# EAGLE board PCB-ACMb (EAGLE 6.4)
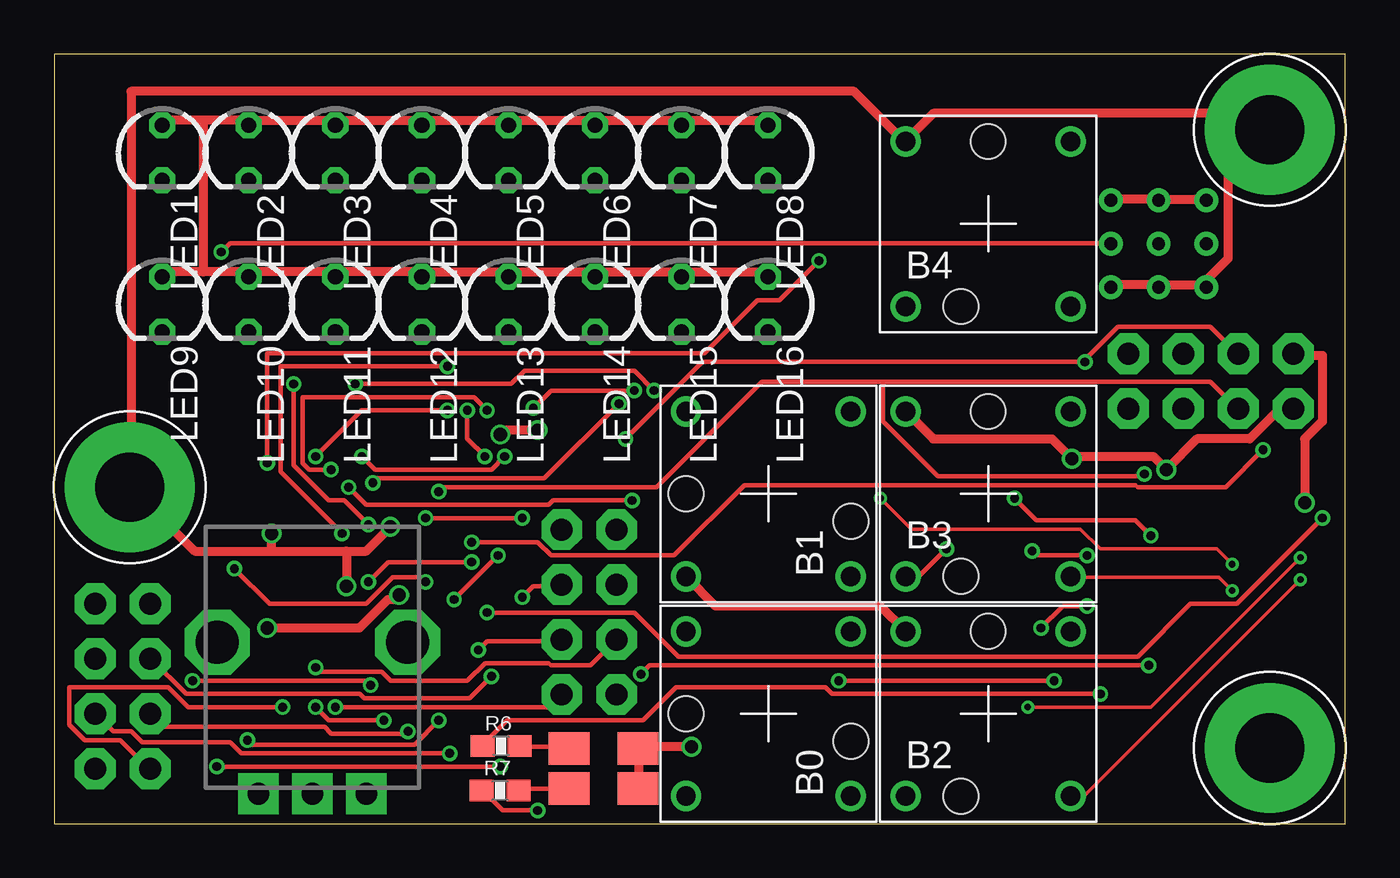
[diagram p0: board, top side]
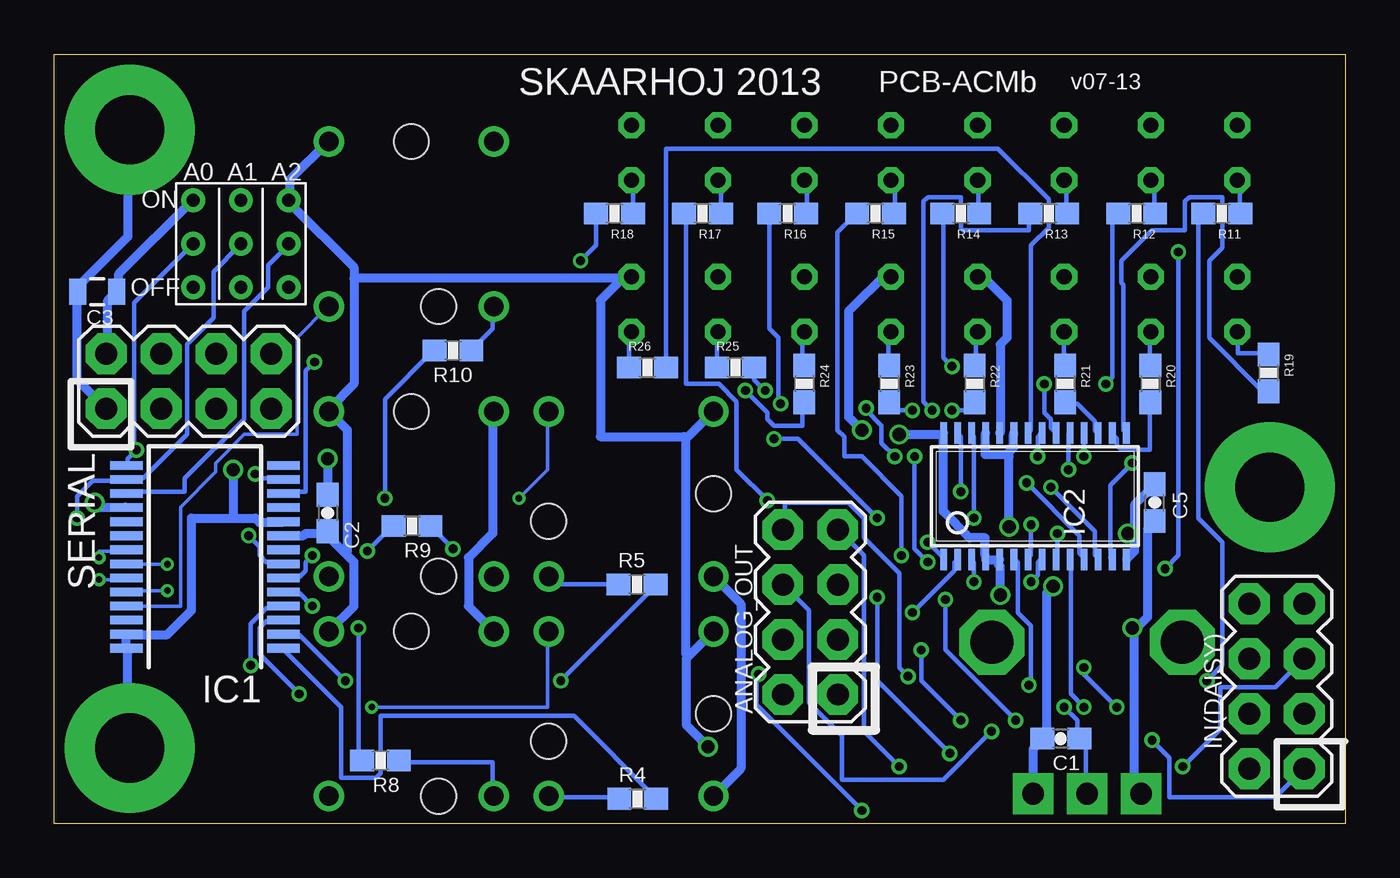
[diagram p1: board, bottom side, seen from below]

Size 59.69 x 35.56 mm. Coordinates in mm from the lower left corner, seen from the top.
Outline: 0,0 59.69,0 59.69,35.56 0,35.56 0,0
Copper layers (1*16): Top 0.035mm / dielectric 1.5mm / Bottom 0.035mm
Design rules "Fusion_eagle_rule_v1.1": minimum track width 6mil, minimum drill 12mil, track to track 6mil, track to pad 6mil, pad to pad 6mil, via to via 6mil, smd to smd 0mil, copper to edge 10mil, drill to drill 10mil, minimum pad ring 10mil, minimum via ring 6mil, stop-mask expansion 2mil, vias tented up to drill 100mil, thermal gap 10mil
Net classes: 0 default: width 0.203 mm, drill 0.406 mm, clearance 0.152 mm; 1 Power: width 0.406 mm, drill 0.61 mm, clearance 0.203 mm; 2 Signal: width 0.152 mm, clearance 0.152 mm

## Footprints (pad centres in the part's own frame; a part is rotated, then mirrored left to right if it is on the bottom)
2X4 = drill 1.016 pad 1.88 octagon: 1 -3.81,-1.27; 2 -3.81,1.27; 3 -1.27,-1.27; 4 -1.27,1.27; 5 1.27,-1.27; 6 1.27,1.27; 7 3.81,-1.27; 8 3.81,1.27
CFPB-6/9MM = drill 0.9: P$1 -3.81,3.81; P$2 3.81,-3.81; P$3 3.81,3.81; P$4 -3.81,-3.81 | hole 1.6: 0,3.81; -1.27,-3.81
LEDBICOLOR-SMD = smd 1.9 x 1.5: P$1 1.6,0.925; P$2 -1.6,0.925; P$3 1.6,-0.925; P$4 -1.6,-0.925
0603-CAP = smd 1.1 x 1: 1 -0.85,0; 2 0.85,0
0805 = smd 0.8 x 1.2: 1 -0.9,0; 2 0.9,0
SSOP28 = smd 0.4 x 1.5: 1 -4.225,-3.625; 2 -3.575,-3.625; 3 -2.925,-3.625; 4 -2.275,-3.625; 5 -1.625,-3.625; 6 -0.975,-3.625; 7 -0.325,-3.625; 8 0.325,-3.625; 9 0.975,-3.625; 10 1.625,-3.625; 11 2.275,-3.625; 12 2.925,-3.625; 13 3.575,-3.625; 14 4.225,-3.625; 15 4.225,3.625; 16 3.575,3.625; 17 2.925,3.625; 18 2.275,3.625; 19 1.625,3.625; 20 0.975,3.625; 21 0.325,3.625; 22 -0.325,3.625; 23 -0.975,3.625; 24 -1.625,3.625; 25 -2.275,3.625; 26 -2.925,3.625; 27 -3.575,3.625; 28 -4.225,3.625
TSSOP28 = smd 0.305 x 0.991: 1 -4.225,-2.918; 2 -3.575,-2.918; 3 -2.925,-2.918; 4 -2.275,-2.918; 5 -1.625,-2.918; 6 -0.975,-2.918; 7 -0.325,-2.918; 8 0.325,-2.918; 9 0.975,-2.918; 10 1.625,-2.918; 11 2.275,-2.918; 12 2.925,-2.918; 13 3.575,-2.918; 14 4.225,-2.918; 15 4.225,2.918; 16 3.575,2.918; 17 2.925,2.918; 18 2.275,2.918; 19 1.625,2.918; 20 0.975,2.918; 21 0.325,2.918; 22 -0.325,2.918; 23 -0.975,2.918; 24 -1.625,2.918; 25 -2.275,2.918; 26 -2.925,2.918; 27 -3.575,2.918; 28 -4.225,2.918
LED3MM = drill 0.7 pad 1.2 octagon: A -1.27,0; K 1.27,0
ALPS_POT = drill 1 pad 1.88 square: P$1 7,-2.5; P$2 7,0; P$3 7,2.5 | drill 2 octagon: P$4 0,-4.4; P$5 0,4.4
0603-RES = smd 1.1 x 1: 1 -0.85,0; 2 0.85,0
3.2MMPAD6MM = drill 3.2 pad 6: P$1 0,0
3BITADDR = drill 0.6: A0 -2.2,0; A1 0,0; A2 2.2,0; H1 -2.2,2; H2 0,2; H3 2.2,2; L1 -2.2,-2; L2 0,-2; L3 2.2,-2

## Placement (x,y rotation side)
ANALOG_OUT  M04X2  [2X4]  24.73,9.78 90 bottom
B0  CFPB  [CFPB-6/9MM]  33.02,5.08 90 top
B1  CFPB  [CFPB-6/9MM]  33.02,15.24 90 top
B2  CFPB  [CFPB-6/9MM]  43.18,5.08 0 top
B3  CFPB  [CFPB-6/9MM]  43.18,15.24 0 top
B4  CFPB  [CFPB-6/9MM]  43.18,27.71 0 top
BILED1  LEDBICOLOR-SMD  [LEDBICOLOR-SMD]  25.4,2.54 0 top
C1  10nF  [0603-CAP]  13.15,3.93 180 bottom
C2  100nF  [0603-CAP]  47.05,14.36 270 bottom
C3  10uF  [0805]  57.7,24.58 180 bottom
C5  100nF  [0603-CAP]  8.81,14.84 90 bottom
IC1  MCP23017SS  [SSOP28]  52.72,12.33 90 bottom
IC2  PCA9685  [TSSOP28]  14.35,15.13 0 bottom
IN(DAISY)  M04X2  [2X4]  3.17,6.35 90 bottom
LED1  LED3MM  [LED3MM]  5,31 270 top
LED2  LED3MM  [LED3MM]  9,31 270 top
LED3  LED3MM  [LED3MM]  13,31 270 top
LED4  LED3MM  [LED3MM]  17,31 270 top
LED5  LED3MM  [LED3MM]  21,31 270 top
LED6  LED3MM  [LED3MM]  25,31 270 top
LED7  LED3MM  [LED3MM]  29,31 270 top
LED8  LED3MM  [LED3MM]  33,31 270 top
LED9  LED3MM  [LED3MM]  5,24 270 top
LED10  LED3MM  [LED3MM]  9,24 270 top
LED11  LED3MM  [LED3MM]  13,24 270 top
LED12  LED3MM  [LED3MM]  17,24 270 top
LED13  LED3MM  [LED3MM]  21,24 270 top
LED14  LED3MM  [LED3MM]  25,24 270 top
LED15  LED3MM  [LED3MM]  29,24 270 top
LED16  LED3MM  [LED3MM]  33,24 270 top
POT1  [ALPS_POT]  11.94,8.38 270 top
R4  47R  [0603-RES]  32.71,1.15 0 bottom
R5  47R  [0603-RES]  32.74,11.06 0 bottom
R6  820R  [0603-RES]  20.66,3.6 180 top
R7  150R  [0603-RES]  20.61,1.53 180 top
R8  47R  [0603-RES]  44.6,2.91 180 bottom
R9  47R  [0603-RES]  43.15,13.76 180 bottom
R10  47R  [0603-RES]  41.25,21.86 180 bottom
R11  270R  [0603-RES]  5.71,28.19 180 bottom
R12  270R  [0603-RES]  9.65,28.19 180 bottom
R13  270R  [0603-RES]  13.72,28.19 180 bottom
R14  270R  [0603-RES]  17.78,28.19 180 bottom
R15  270R  [0603-RES]  21.72,28.19 180 bottom
R16  270R  [0603-RES]  25.78,28.19 180 bottom
R17  270R  [0603-RES]  29.72,28.19 180 bottom
R18  270R  [0603-RES]  33.78,28.19 180 bottom
R19  270R  [0603-RES]  3.56,20.83 270 bottom
R20  270R  [0603-RES]  9.02,20.32 270 bottom
R21  270R  [0603-RES]  12.95,20.32 270 bottom
R22  270R  [0603-RES]  17.14,20.32 270 bottom
R23  270R  [0603-RES]  21.08,20.32 270 bottom
R24  270R  [0603-RES]  25.02,20.32 270 bottom
R25  270R  [0603-RES]  28.19,21.08 0 bottom
R26  270R  [0603-RES]  32.26,21.08 0 bottom
SERIAL  M04X2  [2X4]  53.47,20.45 0 bottom
U$15  GNDPAD6MM  [3.2MMPAD6MM]  56.19,3.5 0 top
U$19  3BITADDR  [3BITADDR]  51.05,26.8 0 bottom
U$20  GNDPAD6MM  [3.2MMPAD6MM]  3.5,15.55 0 top
U$21  GNDPAD6MM  [3.2MMPAD6MM]  56.19,32.06 0 top

## Library data of the parts
ANALOG_OUT C1-C3 C5 IN(DAISY) POT1 R4-R26 SERIAL = SparkFun
B0 B1-B4 BILED1 LED1-LED16 U$15 U$19-U$21 = SKAARHOJ
IC1 = microchip; MF: MICROCHIP; MPN: MCP23017-E/SS; OC_FARNELL: 1467674; OC_NEWARK: 31K2960
IC2 = wsmith

## Nets
5V [Power]: B0.P$3 B1.P$3 B2.P$3 B3.P$3 B4.P$3 BILED1.P$1 BILED1.P$3 C2.2 C3.1 C5.1 IC1.9 IC1.18 IC2.4 IC2.5 IC2.24 IC2.28 LED1.A LED2.A LED3.A LED4.A LED5.A LED6.A LED7.A LED8.A LED9.A LED10.A LED11.A LED12.A LED13.A LED14.A LED15.A LED16.A POT1.P$1 SERIAL.2 U$19.H1 U$19.H2 U$19.H3
A0: IC1.15 IC2.1 U$19.A0
A1: IC1.16 IC2.2 U$19.A1
A2: IC1.17 IC2.3 U$19.A2
ANALOG1: ANALOG_OUT.1 C1.1 POT1.P$2
GND [Power]: B0.P$1 B1.P$1 B2.P$1 B3.P$1 B4.P$1 C1.2 C2.1 C3.2 C5.2 IC1.10 IC1.27 IC1.28 IC2.14 IC2.23 IC2.25 POT1.P$3 SERIAL.1 U$15.P$1 U$19.L1 U$19.L2 U$19.L3 U$20.P$1 U$21.P$1
GPA0 [Signal]: B0.P$2 IC1.21
GPA1 [Signal]: B1.P$2 IC1.22
GPA2 [Signal]: B2.P$2 IC1.23
GPA3 [Signal]: B3.P$2 IC1.24
GPA4 [Signal]: B4.P$2 IC1.25
GPA5 [Signal]: IC1.26
I2C_SCL: IC1.12 IC2.26 SERIAL.4
I2C_SDA: IC1.13 IC2.27 SERIAL.3
L0: LED1.K R11.1
L1: LED2.K R12.1
L2: LED3.K R13.1
L3: LED4.K R14.1
L4: LED5.K R15.1
L5: LED6.K R16.1
L6: LED7.K R17.1
L7: LED8.K R18.1
L8: LED9.K R19.1
L9: LED10.K R20.1
L10: LED11.K R21.1
L11: LED12.K R22.1
L12: LED13.K R23.1
L13: LED14.K R24.1
L14: LED15.K R25.1
L15: LED16.K R26.1
LC0: B0.P$4 R4.1
LC1: B1.P$4 R5.1
LC2: BILED1.P$2 R6.1
LC3: BILED1.P$4 R7.1
LC4: B2.P$4 R8.1
LC5: B3.P$4 R9.1
LC6: B4.P$4 R10.1
N$1: IC2.13 R18.2
N$2: IC1.4 R7.2
N$3: IC1.5 R8.2
N$4: IC1.6 R9.2
N$5: IC1.7 R10.2
N$7: IC1.3 R6.2
N$8: IC1.2 R5.2
N$9: IC1.1 R4.2
N$10: ANALOG_OUT.3 IN(DAISY).1
N$11: ANALOG_OUT.5 IN(DAISY).3
N$12: ANALOG_OUT.7 IN(DAISY).5
N$13: ANALOG_OUT.4 IN(DAISY).2
N$14: ANALOG_OUT.6 IN(DAISY).4
N$15: ANALOG_OUT.8 IN(DAISY).6
N$16: IC2.12 R17.2
N$17: IC2.11 R16.2
N$18: IC2.10 R15.2
N$19: IC2.9 R14.2
N$20: IC2.8 R13.2
N$21: IC2.7 R12.2
N$22: IC2.6 R11.2
N$23: IC2.15 R19.2
N$24: IC2.16 R20.2
N$25: IC2.17 R21.2
N$26: IC2.18 R22.2
N$27: IC2.19 R23.2
N$28: IC2.20 R24.2
N$29: IC2.21 R25.2
N$30: IC2.22 R26.2

## Tracks (layer width: path | path; a pad name or v marks a point on that pad's centre or on a via)
5V  (via drill 0.61)
  Top 0.406: U$19.H3 48.87,28.85 51,28.85 U$19.H2 51.21,28.85 53.24,28.85 U$19.H1 | v57.81,14.83 57.81,17.78 58.62,18.59 58.62,21.64 57.3,21.64 SERIAL.2 | 6.91,32.51 8.84,32.51 LED2.A 9.04,32.51 12.9,32.51 LED3.A 13.11,32.51 16.87,32.51 LED4.A 17.07,32.51 20.83,32.51 LED5.A 21.03,32.51 24.89,32.51 LED6.A 25.09,32.51 28.85,32.51 LED7.A 29.06,32.51 32.82,32.51 LED8.A | 6.91,32.51 4.98,32.51 LED1.A | v15.95,10.57 15.75,10.36 15.44,10.36 14.12,9.04 v9.86,9.04 | BILED1.P$3 27.03,1.63 27.03,3.45 BILED1.P$1 27.23,3.45 27.33,3.56 v29.46,3.56 | 6.91,25.5 8.94,25.5 LED10.A 9.14,25.5 12.9,25.5 LED11.A 13.11,25.5 16.97,25.5 LED12.A 17.17,25.5 21.03,25.5 LED13.A 21.23,25.5 24.99,25.5 LED14.A 25.2,25.5 28.96,25.5 LED15.A 29.16,25.5 33.02,25.5 LED16.A | 6.91,25.5 5.08,25.5 LED9.A | v20.62,17.98 20.83,18.19 v22.35,18.19 | 6.91,25.5 6.91,32.51
  Bottom 0.406: IC1.9 49.07,13.31 48.16,13.31 48.06,13.41 47.14,13.41 C2.2 47.04,13.31 46.23,12.5 | 46.23,12.5 45.82,12.09 45.82,10.06 B2.P$3 | 46.23,12.5 46.13,12.6 46.13,18.19 B3.P$3 46.94,19.2 45.82,20.32 45.82,25.2 | B4.P$3 47.04,31.5 48.77,29.77 48.77,28.85 U$19.H3 48.77,28.65 45.82,25.7 45.82,25.2 | SERIAL.2 57.2,21.74 57.2,24.18 56.9,24.49 C3.1 56.69,24.69 56.69,25.4 53.34,28.75 U$19.H1 | v57.81,14.83 57.81,14.63 56.39,14.63 IC1.18 | 18.59,17.98 18.59,14.43 17.37,13.21 16.66,13.21 16.66,12.39 IC2.4 16.56,12.19 16.05,12.19 IC2.5 16.05,11.99 15.95,11.89 v15.95,10.57 | 18.59,17.98 IC2.28 | 9.75,8.94 9.14,9.55 9.14,13.61 8.84,13.92 C5.1 | 9.75,8.94 9.75,1.73 9.45,1.42 POT1.P$1 | v9.86,9.04 9.75,8.94 | v29.46,3.56 30.48,4.57 30.48,7.62 30.38,7.72 | B0.P$3 30.38,7.72 | 30.48,17.78 B1.P$3 | 30.48,17.78 30.48,7.82 30.38,7.72 | IC2.24 15.95,18.09 15.95,22.15 15.65,22.45 15.65,24.18 16.97,25.5 LED12.A | 30.48,17.78 30.58,17.88 34.44,17.88 34.44,24.18 33.12,25.5 LED16.A 33.63,25.2 45.82,25.2 | v20.62,17.98 18.59,17.98 | v22.35,18.19 22.96,18.8 22.96,23.67 21.13,25.5 LED13.A
A0  (via drill 0.41)
  Top 0.203: v19.3,13.01 22.35,13.01 22.96,12.39 28.65,12.39 31.9,15.65 49.99,15.65 50.09,15.54 54.15,15.54 v55.88,17.27
  Bottom 0.203: v19.3,13.01 18.59,12.29 IC2.1 | IC1.15 56.29,16.56 56.29,16.87 v55.88,17.27 55.98,17.27 55.98,24.08 53.34,26.72 U$19.A0
A1  (via drill 0.41)
  Top 0.203: v20.02,9.75 26.82,9.75 28.85,7.72 50.09,7.72 52.53,10.16 54.66,10.16 v58.62,14.12
  Bottom 0.203: v20.02,9.75 18.09,11.68 18.09,12.09 17.98,12.19 IC2.2 | v58.62,14.12 58.62,15.14 57.91,15.85 56.39,15.85 IC1.16 56.29,15.95 55.58,15.95 53.54,17.98 53.54,22.15 52.32,23.37 52.32,25.5 51.1,26.72 U$19.A1
A2  (via drill 0.41)
  Top 0.203: v17.17,11.18 16.97,11.38 15.65,11.38 14.43,10.16 9.96,10.16 v8.33,11.79 | v7.72,26.42 8.13,26.82 48.77,26.82 U$19.A2
  Bottom 0.203: v17.17,11.18 17.17,12.09 17.27,12.19 IC2.3 | v8.33,11.79 7.72,12.39 v7.72,26.42 | IC1.17 56.29,15.34 53.65,15.34 53.65,15.95 50.9,18.69 50.9,23.67 49.78,24.79 49.78,25.81 48.87,26.72 U$19.A2
ANALOG1  (via drill 0.41)
  Top 0.203: v13.01,5.38 22.86,5.38 23.37,5.89 ANALOG_OUT.1
  Bottom 0.203: POT1.P$2 11.99,1.42 11.99,3.56 12.29,3.86 C1.1 12.39,3.96 12.39,4.78 v13.01,5.38
GND  (via drill 0.61)
  Top 0.406: B3.P$1 40.64,17.78 46.13,17.78 v47.04,16.87 47.14,16.97 50.8,16.97 v51.41,16.36 52.83,17.78 55.27,17.78 56.59,19.1 57.2,19.1 SERIAL.1 | B1.P$1 30.58,10.06 38.2,10.06 B2.P$1 | v15.54,13.72 14.43,12.6 13.51,12.6 | 10.06,12.6 6.5,12.6 3.56,15.54 U$20.P$1 3.56,15.75 3.56,33.83 36.98,33.83 39.22,31.6 B4.P$1 39.42,31.6 40.64,32.82 55.47,32.82 56.19,32.11 U$21.P$1 54.25,32.72 54.25,26.11 53.24,25.09 U$19.L1 53.24,24.89 51.21,24.89 U$19.L2 51,24.89 48.87,24.89 U$19.L3 | 10.06,12.6 13.51,12.6 | 10.06,12.6 v10.06,13.41 | 13.51,12.6 v13.51,10.97
  Bottom 0.406: 51.41,14.12 53.34,14.12 53.34,9.86 54.46,8.74 56.19,8.74 IC1.27 56.39,8.74 56.39,8.13 IC1.28 56.29,7.92 56.29,3.56 U$15.P$1 | 51.41,14.12 50.39,14.12 50.19,13.92 49.17,13.92 IC1.10 | B0.P$1 27.94,2.54 27.94,10.16 B1.P$1 | v47.04,16.87 47.04,15.24 C2.1 | B2.P$1 40.54,10.06 40.54,12.29 39.42,13.41 39.42,19 B3.P$1 | v51.41,16.36 51.41,14.12 | POT1.P$3 14.43,1.42 14.43,3.45 14.02,3.86 C1.2 13.92,4.06 13.82,4.17 13.82,10.67 v13.51,10.97 | 9.75,13.41 9.75,14.73 8.84,15.65 C5.2 | 9.75,13.41 9.75,12.6 10.06,12.29 IC2.14 | 15.65,17.07 15.34,17.37 15.34,17.98 IC2.23 | 15.65,17.07 16.66,17.07 16.66,17.98 IC2.25 | v15.54,13.72 15.54,16.97 15.65,17.07 | v10.06,13.41 9.75,13.41 | SERIAL.1 58.62,20.52 58.62,24.49 C3.2 58.62,24.79 56.29,27.13 56.29,32 U$21.P$1
GPA0  (via drill 0.3)
  Top 0.152: v57.61,12.29 50.7,5.38 v45.01,5.38
  Bottom 0.152: v57.61,12.29 57.61,12.6 56.39,12.6 IC1.21 | v45.01,5.38 36.88,5.38 36.88,8.84 B0.P$2
GPA1  (via drill 0.3)
  Top 0.152: v54.46,11.99 53.75,12.7 48.36,12.7 47.45,13.61 39.62,13.61 v38.2,15.04
  Bottom 0.152: v54.46,11.99 56.29,11.99 IC1.22 | v38.2,15.04 36.88,16.36 36.88,19 B1.P$2
GPA2  (via drill 0.3)
  Top 0.152: v57.61,11.28 47.65,1.32 47.04,1.32 B2.P$2
  Bottom 0.152: v57.61,11.28 56.39,11.28 IC1.23
GPA3  (via drill 0.3)
  Top 0.152: v54.46,10.77 53.85,11.38 47.04,11.38 B3.P$2
  Bottom 0.152: v54.46,10.77 56.29,10.77 IC1.24
GPA4
  Bottom 0.152: IC1.25 56.29,10.06 53.85,10.06 53.85,14.63 52.22,16.26 52.22,16.66 50.9,17.98 48.46,17.98 48.46,22.45 47.04,23.88 B4.P$2
I2C_SCL  (via drill 0.41)
  Top 0.203: v21.64,14.12 v17.17,14.12 | v26.42,17.78 29.97,21.34 47.55,21.34 47.6,21.39 | 47.6,21.39 49.17,22.96 53.44,22.96 54.66,21.74 SERIAL.4 | v47.65,21.34 47.6,21.39
  Bottom 0.203: v17.17,14.12 17.17,17.88 17.27,17.98 IC2.26 | v21.64,14.12 25.3,17.78 v26.42,17.78 | v47.65,21.34 48.06,20.93 48.06,15.34 49.07,15.34 IC1.12
I2C_SDA  (via drill 0.41)
  Top 0.203: v17.78,15.34 17.98,15.54 27.84,15.54 32.72,20.42 38.3,20.42 | 38.3,20.42 53.44,20.42 54.66,19.2 SERIAL.3 | v50.39,16.15 50.29,16.05 40.84,16.05 38.3,18.59 38.3,20.42
  Bottom 0.203: v17.78,15.34 17.78,17.88 17.88,17.98 IC2.27 | v50.39,16.15 50.39,15.95 49.17,15.95 IC1.13
L0
  Bottom 0.203: R11.1 4.88,28.25 4.88,29.87 LED1.K
L1
  Bottom 0.203: R12.1 8.84,28.25 8.84,29.87 LED2.K
L2
  Bottom 0.203: R13.1 12.9,28.25 12.9,29.87 LED3.K
L3
  Bottom 0.203: R14.1 16.97,28.25 16.97,29.87 LED4.K
L4
  Bottom 0.203: R15.1 20.83,28.25 20.83,29.87 LED5.K
L5
  Bottom 0.203: R16.1 24.89,28.25 24.89,29.87 LED6.K
L6
  Bottom 0.203: R17.1 28.85,28.25 28.85,29.87 LED7.K
L7
  Bottom 0.203: R18.1 32.92,28.25 32.92,29.87 LED8.K
L8
  Bottom 0.203: R19.1 3.56,21.74 4.98,21.74 4.98,22.96 LED9.K
L9
  Bottom 0.203: R20.1 9.04,21.23 9.04,22.96 LED10.K
L10
  Bottom 0.203: R21.1 13.01,21.23 13.01,22.96 LED11.K
L11
  Bottom 0.203: R22.1 17.07,21.23 17.07,22.96 LED12.K
L12
  Bottom 0.203: R23.1 21.13,21.23 21.13,22.96 LED13.K
L13
  Bottom 0.203: R24.1 25.09,21.23 25.09,22.96 LED14.K
L14
  Bottom 0.203: R25.1 29.06,21.13 29.06,22.96 LED15.K
L15
  Bottom 0.203: R26.1 33.12,21.13 33.12,22.96 LED16.K
LC0
  Bottom 0.203: R4.1 33.63,1.22 36.78,1.22 B0.P$4
LC1
  Bottom 0.203: R5.1 33.63,11.07 36.78,11.07 36.78,11.38 B1.P$4
LC2
  Top 0.203: R6.1 21.54,3.56 23.77,3.56 BILED1.P$2
LC3
  Top 0.203: R7.1 21.54,1.63 23.77,1.63 BILED1.P$4
LC4
  Bottom 0.203: R8.1 43.69,2.85 39.42,2.85 39.42,1.32 B2.P$4
LC5  (via drill 0.41)
  Top 0.203: v41.25,12.7 40.03,11.48 39.42,11.48 B3.P$4
  Bottom 0.203: v41.25,12.7 42.27,13.72 R9.1
LC6
  Bottom 0.203: R10.1 40.34,21.95 39.42,22.86 39.42,23.88 B4.P$4
N$1  (via drill 0.41)
  Top 0.203: v9.86,16.66 9.86,21.74 30.07,21.74 32.51,24.18 33.53,24.18 v35.36,26.01
  Bottom 0.203: v9.86,16.66 10.87,15.65 10.87,12.29 IC2.13 | v35.36,26.01 34.65,26.72 34.65,28.14 R18.2
N$2  (via drill 0.41)
  Top 0.203: v22.35,0.61 20.73,0.61 19.81,1.52 R7.2 | v27.13,6.91 27.53,7.32 v50.6,7.32
  Bottom 0.203: v22.35,0.61 27.23,5.49 27.23,6.81 v27.13,6.91 | v50.6,7.32 50.6,9.25 49.89,9.96 49.17,9.96 IC1.4
N$3  (via drill 0.41)
  Top 0.203: v45.62,9.04 46.63,10.06 v47.75,10.06
  Bottom 0.203: v45.62,9.04 45.62,3.05 45.52,2.95 R8.2 | v47.75,10.06 48.36,10.67 49.07,10.67 IC1.5
N$4  (via drill 0.41)
  Top 0.203: v45.21,12.6 45.41,12.39 v47.75,12.39
  Bottom 0.203: v45.21,12.6 44.09,13.72 R9.2 | v47.75,12.39 48.06,12.09 48.06,11.68 48.36,11.38 49.07,11.38 IC1.6
N$5  (via drill 0.41)
  Top 0.203: v44.4,15.04 45.41,14.02 49.99,14.02 v50.7,13.31
  Bottom 0.203: v44.4,15.04 44.4,19.61 42.16,21.84 R10.2 | v50.7,13.31 50.19,12.8 50.19,12.39 49.89,12.09 49.17,12.09 IC1.7
N$7  (via drill 0.41)
  Top 0.203: v48.36,5.99 35.97,5.99 35.66,6.3 28.75,6.3 27.23,4.78 20.93,4.78 19.81,3.66 R6.2
  Bottom 0.203: v48.36,5.99 50.19,7.82 50.19,9.04 49.89,9.35 49.17,9.35 IC1.3
N$8  (via drill 0.41)
  Top 0.203: v46.23,6.6 v36.27,6.6
  Bottom 0.203: v36.27,6.6 31.9,10.97 R5.2 | v46.23,6.6 48.36,8.74 49.07,8.74 IC1.2
N$9
  Bottom 0.203: R4.2 31.9,1.22 35.66,4.98 44.6,4.98 44.6,2.34 44.81,2.13 46.43,2.13 46.43,5.38 49.07,8.03 IC1.1
N$10  (via drill 0.41)
  Top 0.203: v8.94,3.86 9.14,3.66 16.66,3.66 v17.78,4.78 | v19.61,8.03 20.02,8.43 23.37,8.43 ANALOG_OUT.3
  Bottom 0.203: v8.94,3.86 8.13,3.05 8.13,1.22 3.25,1.22 1.93,2.54 IN(DAISY).1 | v17.78,4.78 19.61,6.6 v19.61,8.03
N$11  (via drill 0.41)
  Top 0.203: v18.29,3.25 8.64,3.25 8.13,3.76 4.06,3.76 3.56,4.27 2.74,4.27 1.93,5.08 IN(DAISY).3 | v21.64,10.46 22.15,10.97 23.37,10.97 ANALOG_OUT.5
  Bottom 0.203: v18.29,3.25 21.64,6.6 v21.64,10.46
N$12  (via drill 0.41)
  Top 0.203: v20.62,2.64 v7.52,2.64
  Bottom 0.203: v7.52,2.64 5.79,4.37 5.79,6.3 3.25,6.3 1.93,7.62 IN(DAISY).5 | v20.62,2.64 22.25,4.27 22.25,12.39 23.37,13.51 ANALOG_OUT.7
N$13  (via drill 0.41)
  Top 0.203: v10.57,5.38 6.2,5.38 5.28,6.3 0.71,6.3 0.71,4.57 1.42,3.86 3.05,3.86 4.37,2.54 IN(DAISY).2 | v12.09,7.21 12.29,7.01 15.14,7.01 15.54,6.6 19.1,6.6 19.91,7.42 22.86,7.42 22.96,7.32 24.79,7.32 25.91,8.43 ANALOG_OUT.4
  Bottom 0.203: v10.57,5.38 12.09,6.91 v12.09,7.21
N$14  (via drill 0.41)
  Top 0.203: v16.36,4.27 16.26,4.17 12.8,4.17 12.5,4.47 5.08,4.47 4.47,5.08 IN(DAISY).4
  Bottom 0.203: v16.36,4.27 18.59,2.03 23.27,2.03 23.27,4.06 24.79,5.59 24.79,9.86 25.91,10.97 ANALOG_OUT.6
N$15  (via drill 0.41)
  Top 0.203: v20.22,6.81 19.2,5.79 14.33,5.79 14.12,5.99 6.1,5.99 4.47,7.62 IN(DAISY).6
  Bottom 0.203: v20.22,6.81 20.62,7.21 20.62,11.58 22.25,13.21 22.25,14.12 22.96,14.83 25.91,14.83 25.91,13.61 ANALOG_OUT.8
N$16  (via drill 0.41)
  Top 0.203: v13.61,15.54 14.43,14.73 22.86,14.73 23.06,14.94 v26.72,14.94
  Bottom 0.203: v13.61,15.54 11.58,13.51 11.58,12.39 11.48,12.29 IC2.12 | v26.72,14.94 28.14,16.36 28.14,19.51 28.96,20.32 30.48,20.32 30.48,28.14 R17.2
N$17  (via drill 0.41)
  Top 0.203: v14.73,15.75 14.94,15.95 22.66,15.95 v26.11,19.41
  Bottom 0.203: v14.73,15.75 12.29,13.31 12.29,12.5 12.09,12.29 IC2.11 | v26.11,19.41 26.21,19.51 26.21,22.45 26.62,22.86 26.62,28.14 R16.2
N$18  (via drill 0.41)
  Top 0.203: v12.09,5.38 12.7,4.78 v15.24,4.78 | v20.52,12.39 v18.49,10.36
  Bottom 0.203: v12.09,5.38 12.7,5.99 12.7,12.19 IC2.10 | v15.24,4.78 18.49,8.03 v18.49,10.36 | v20.52,12.39 20.52,15.14 22.35,16.97 23.16,16.97 23.16,17.88 23.47,18.19 23.47,27.33 22.66,28.14 R15.2
N$19  (via drill 0.41)
  Top 0.203: v13.31,13.41 10.46,16.26 10.46,21.13 v18.19,21.13
  Bottom 0.203: v13.31,13.41 13.31,12.29 IC2.9 | v18.19,21.13 18.59,21.54 18.59,28.14 R14.2
N$20  (via drill 0.41)
  Top 0.203: v14.53,11.18 15.44,12.09 v19.3,12.09 | v19.91,16.97 19.1,17.78 v19.1,19.1
  Bottom 0.203: v14.53,11.18 14.22,11.48 14.22,12.09 14.12,12.19 IC2.8 | v19.3,12.09 19.91,12.7 v19.91,16.97 | v19.1,19.1 19.51,19.51 19.51,28.75 19.3,28.96 17.78,28.96 17.78,27.53 17.68,27.43 14.63,27.43 14.63,28.14 R13.2
N$21  (via drill 0.41)
  Top 0.203: v14.53,13.82 13.41,14.94 12.7,14.94 11.07,16.56 v11.07,20.32
  Bottom 0.203: v14.53,13.82 14.53,12.39 14.63,12.29 IC2.7 | v11.07,20.32 10.77,20.62 10.77,27.94 10.57,28.14 R12.2
N$22  (via drill 0.41)
  Top 0.203: v14.63,6.4 14.43,6.6 v6.4,6.6
  Bottom 0.203: v14.63,6.4 14.53,6.5 14.53,9.14 15.14,9.75 15.14,12.09 15.24,12.19 IC2.6 | v6.4,6.6 5.69,7.32 5.69,13.01 6.81,14.12 6.81,27.94 6.6,28.14 R11.2
N$23
  Bottom 0.203: IC2.15 10.16,18.09 10.26,18.19 10.26,24.89 10.36,24.99 10.36,26.01 8.94,27.43 7.42,27.43 7.42,28.75 7.21,28.96 5.69,28.96 5.69,26.62 6.3,26.01 6.3,22.45 3.86,20.02 3.56,20.02 R19.2
N$24
  Bottom 0.203: IC2.16 10.77,17.98 10.57,17.78 10.57,17.48 10.36,17.27 9.04,17.27 9.04,19.41 R20.2
N$25
  Bottom 0.203: IC2.17 11.48,18.09 11.58,18.19 11.58,18.59 12.39,19.41 12.9,19.41 R21.2
N$26  (via drill 0.41)
  Top 0.203: v12.09,16.97 14.22,19.1 v18.19,19.1
  Bottom 0.203: v12.09,16.97 12.09,17.98 IC2.18 | v18.19,19.1 17.17,19.1 17.17,19.41 R22.2
N$27  (via drill 0.41)
  Top 0.203: v12.8,16.36 11.79,16.36 11.48,16.66 11.48,19.71 19.41,19.71 v20.02,19.1
  Bottom 0.203: v12.8,16.36 12.8,17.98 IC2.19 | v20.02,19.1 21.03,19.1 21.03,19.41 R23.2
N$28  (via drill 0.41)
  Top 0.203: v13.92,20.32 21.13,20.32 21.74,20.93 26.82,20.93 v27.74,20.02
  Bottom 0.203: v13.92,20.32 13.92,19 13.61,18.69 13.61,18.29 13.41,18.09 IC2.20 | v27.74,20.02 26.72,19 26.72,18.69 26.42,18.39 25.09,18.39 25.09,19.41 R24.2
N$29  (via drill 0.41)
  Top 0.203: v14.22,16.97 14.83,16.36 20.22,16.36 v20.83,16.97 | v22.15,19.2 22.96,20.02 v26.82,20.02
  Bottom 0.203: v14.22,16.97 14.22,17.88 14.12,17.98 IC2.21 | v20.83,16.97 21.44,17.58 21.44,18.39 22.15,19.1 v22.15,19.2 | v26.82,20.02 27.33,20.52 27.33,21.03 R25.2
N$30
  Bottom 0.203: IC2.22 14.63,18.09 14.53,18.19 14.53,26.72 13.72,27.53 13.72,28.85 16.05,31.19 31.39,31.19 31.39,21.13 R26.2

## Text on the board
_bsilk: v07-13 | PCB-ACMb | SKAARHOJ 2013